# EAGLE board wiseboard8 (EAGLE 8.2.2)
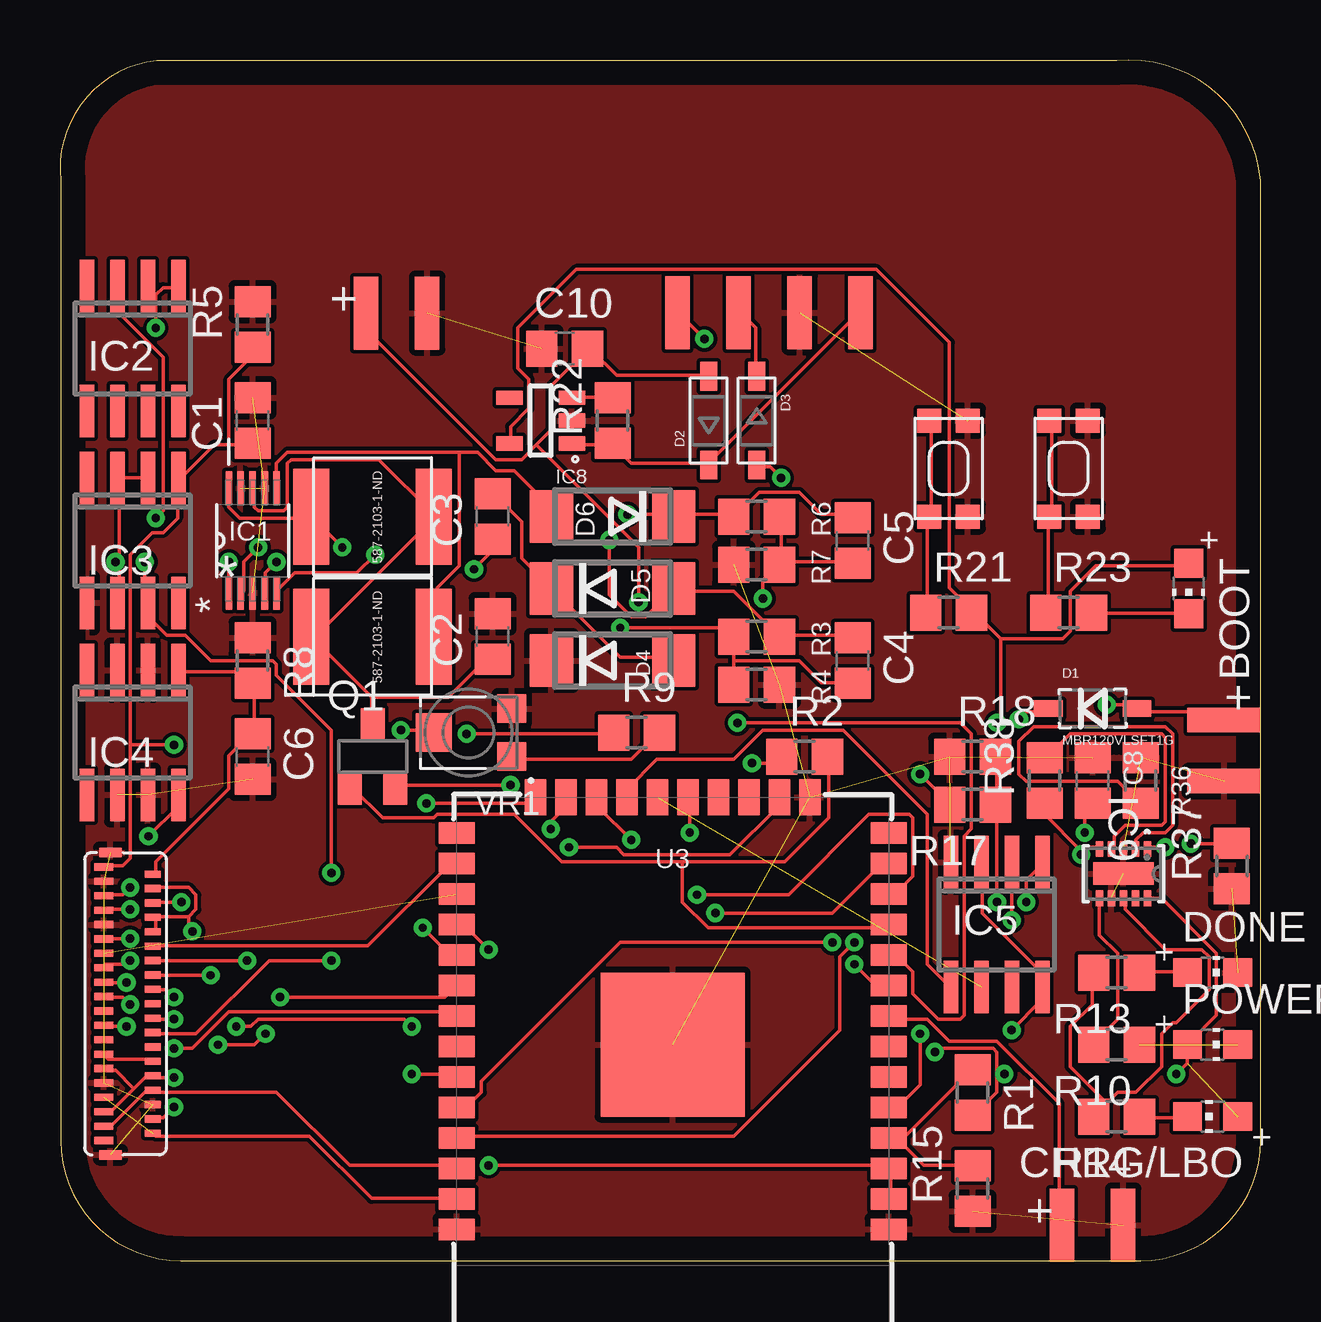
[diagram p0: board, top side]
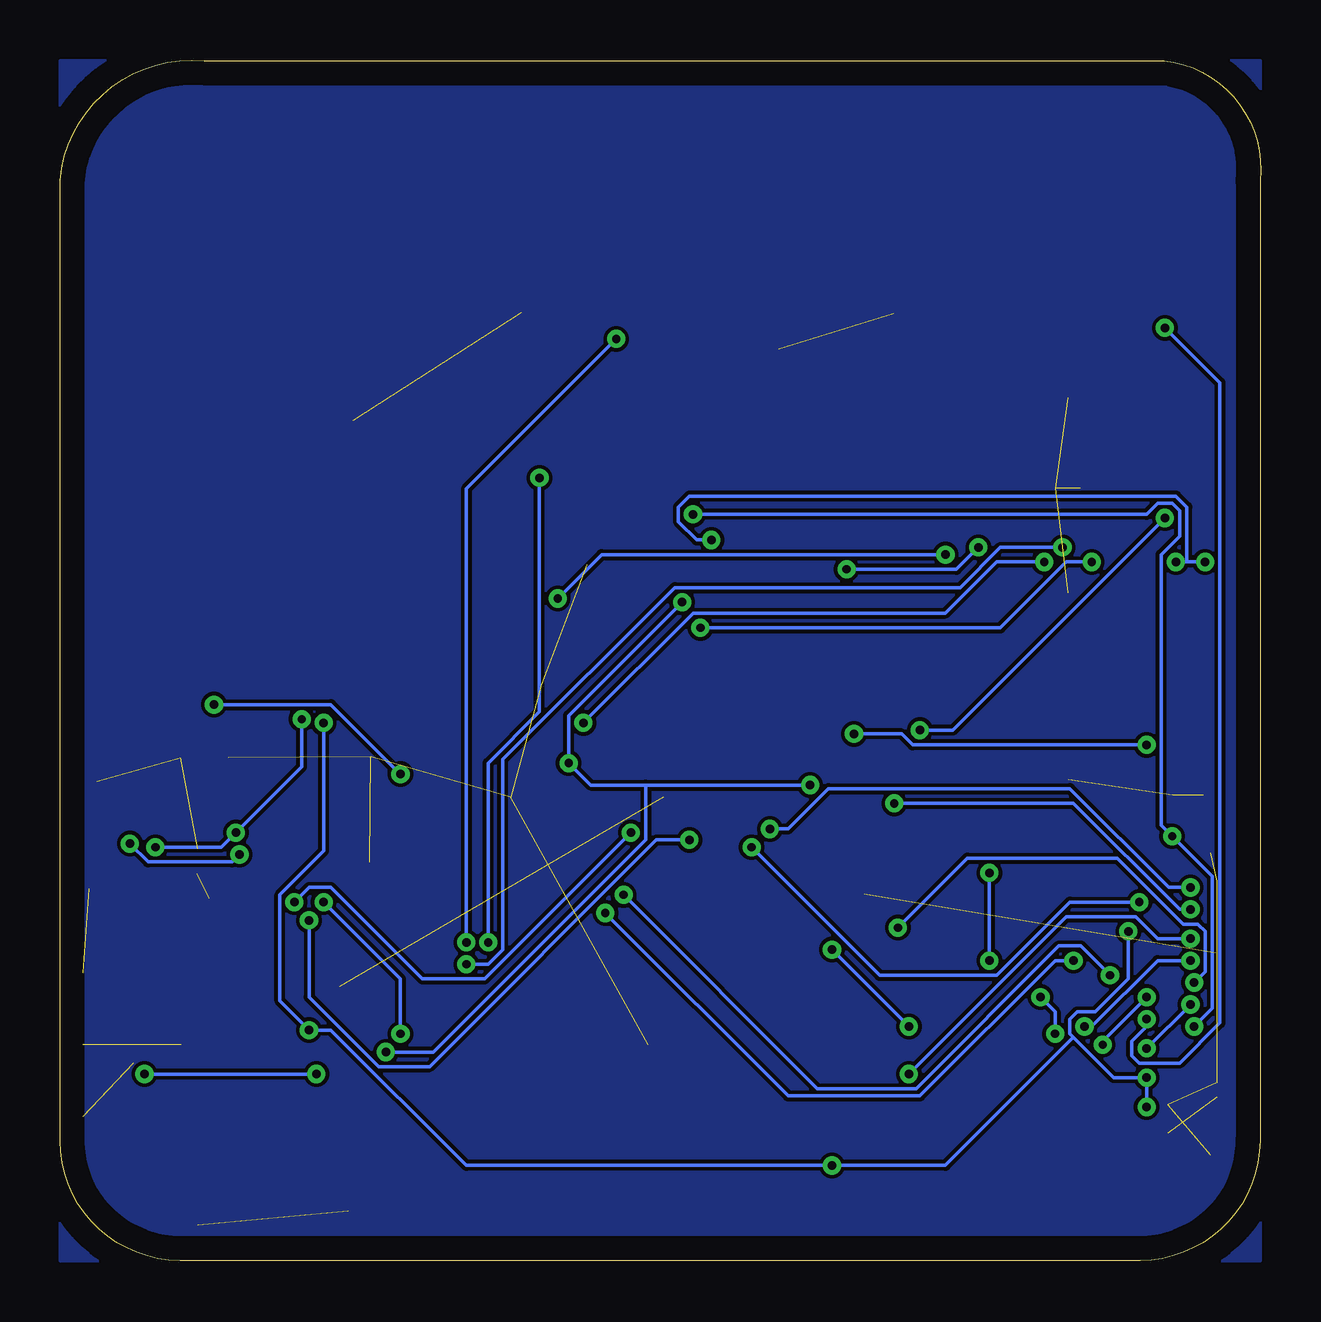
[diagram p1: board, bottom side, seen from below]

Size 50.03 x 50.02 mm. Coordinates in mm from the lower left corner, seen from the top.
Outline: 44.03,50 4.03,50 arc90 0.03,45 0.03,5 arc90 5.03,0 45.03,0 arc90 50.03,5 50.03,45 arc90 44.03,50
Copper layers (1*16): Top 0.035mm / dielectric 1.5mm / Bottom 0.035mm
Design rules "default": minimum track width 6mil, minimum drill 0.35mm, track to track 6mil, track to pad 6mil, pad to pad 6mil, via to via 6mil, smd to smd 6mil, copper to edge 40mil, drill to drill 6mil, minimum pad ring 10mil, minimum via ring 8mil, stop-mask expansion 4mil, vias tented up to drill 0mil, thermal gap 10mil

## Footprints (pad centres in the part's own frame; a part is rotated, then mirrored left to right if it is on the bottom)
587-2103-1-ND = smd 1.5 x 4: P$1 -2.55,0; P$2 2.55,0
CHIP-LED0805 = smd 1.2 x 1.2: A 0,-1.05; C 0,1.05
C0805 = smd 1.3 x 1.5: 1 -0.95,0; 2 0.95,0
SOD-123 = smd 1.2 x 0.7: A 1.85,0; C -1.85,0
DO214AA = smd 1.8 x 2.2: A 2.55,0; C -2.55,0
SOP50P490X110-10N = smd 1.397 x 0.279: 1 -2.184,0.991; 2 -2.184,0.508; 3 -2.184,0; 4 -2.184,-0.508; 5 -2.184,-0.991; 6 2.184,-0.991; 7 2.184,-0.508; 8 2.184,0; 9 2.184,0.508; 10 2.184,0.991
SO08 = smd 0.6 x 2.2: 1 -1.905,-2.6; 2 -0.635,-2.6; 3 0.635,-2.6; 4 1.905,-2.6; 5 1.905,2.6; 6 0.635,2.6; 7 -0.635,2.6; 8 -1.905,2.6
SO8 = smd 0.6 x 2.2: 1 -1.905,-2.6; 2 -0.635,-2.6; 3 0.635,-2.6; 4 1.905,-2.6; 5 1.905,2.6; 6 0.635,2.6; 7 -0.635,2.6; 8 -1.905,2.6
SOT95P280X145-5N = smd 1.1 x 0.6: 1 -1.3,0.95; 2 -1.3,0; 3 -1.3,-0.95; 4 1.3,-0.95; 5 1.3,0.95
DQC10_P84X2P4 = smd 0.66 x 0.305: 1 -1.029,1; 2 -1.029,0.5; 3 -1.029,0; 4 -1.029,-0.5; 5 -1.029,-1; 6 1.029,-1; 7 1.029,-0.5; 8 1.029,0; 9 1.029,0.5; 10 1.029,1 | smd 0.94 x 2.515: 11 0,0
EDGE_CON_2 = smd 1.016 x 3.048: 1 1.27,1.524; 2 -1.27,1.524
EDGE_CON_4 = smd 1.016 x 3.048: 1 2.54,0.254; 2 0,0.254; 3 -5.08,0.254; 4 -2.54,0.254
SOT23 = smd 1 x 1.4: 1 -0.95,-1.306; 2 0.95,-1.306; 3 0,1.306
R0805 = smd 1.3 x 1.5: 1 -0.95,0; 2 0.95,0
KMR2 = smd 1 x 1: 1 2,0.8; 2 2,-0.8; 3 -2,0.8; 4 -2,-0.8
ESP-WROOM-03 = smd 0.9 x 1.5: 1 7.7,9; 2 6.43,9; 3 5.16,9; 4 3.89,9; 5 2.62,9; 6 1.35,9; 7 0.08,9; 8 -1.19,9; 9 -2.46,9; 10 -3.73,9; 11 -5,9; 12 -6.27,9; 13 -7.54,9; 14 -8.81,9; 25 -8.81,-9; 26 -7.54,-9; 27 -6.27,-9; 28 -5,-9; 29 -3.73,-9; 30 -2.46,-9; 31 -1.19,-9; 32 0.08,-9; 33 1.35,-9; 34 2.62,-9; 35 3.89,-9; 36 5.16,-9; 37 6.43,-9; 38 7.7,-9 | smd 1.5 x 0.9: 15 -10.3,5.715; 16 -10.3,4.445; 17 -10.3,3.175; 18 -10.3,1.905; 19 -10.3,0.635; 20 -10.3,-0.635; 21 -10.3,-1.905; 22 -10.3,-3.175; 23 -10.3,-4.445; 24 -10.3,-5.715 | smd 6 x 6: GND 0,0
HFQ339CT-ND = smd 0.4 x 0.95: GND@1 6.6,-0.925; GND@2 -6,-0.925 | smd 0.3 x 0.8: P$1 -5.4,-1.2; P$3 -4.8,-1.2; P$5 -4.2,-1.2; P$7 -3.6,-1.2; P$9 -3,-1.2; P$11 -2.4,-1.2; P$13 -1.8,-1.2; P$15 -1.2,-1.2; P$17 -0.6,-1.2; P$19 0,-1.2; P$21 0.6,-1.2; P$23 1.2,-1.2; P$25 1.8,-1.2; P$27 2.4,-1.2; P$29 3,-1.2; P$31 3.6,-1.2; P$33 4.2,-1.2; P$35 4.8,-1.2; P$37 5.4,-1.2; P$39 6,-1.2 | smd 0.3 x 0.65: P$2 -5.1,0.838; P$4 -4.5,0.838; P$6 -3.9,0.838; P$8 -3.3,0.838; P$10 -2.7,0.838; P$12 -2.1,0.838; P$14 -1.5,0.838; P$16 -0.9,0.838; P$18 -0.3,0.838; P$20 0.3,0.838; P$22 0.9,0.838; P$24 1.5,0.838; P$26 2.1,0.838; P$28 2.7,0.838; P$30 3.3,0.838; P$32 3.9,0.838; P$34 4.5,0.838; P$36 5.1,0.838; P$38 5.7,0.838
TRIM_TC33X-2-103E = smd 1.2 x 1.2: 1 -1.8,1; 3 -1.8,-1 | smd 1.5 x 1.6: 2 1.45,0

## Placement (x,y rotation side)
22  587-2103-1-ND  [587-2103-1-ND]  13.03,31 180 top
BOOT  LED1  [CHIP-LED0805]  47.03,28 180 top
C1  1uF  [C0805]  8.03,35 90 top
C2  1uF  [C0805]  18.03,26 90 top
C3  1uF  [C0805]  18.03,31 90 top
C4  10uF  [C0805]  33.03,25 270 top
C5  10uF  [C0805]  33.03,30 270 top
C6  1uF  [C0805]  8.03,21 270 top
C8  10uF  [C0805]  43.03,20 270 top
C10  10uF  [C0805]  21.03,38 0 top
CHRG/LBO  LED3  [CHIP-LED0805]  48.03,6 90 top
D1  MBR120VLSFT1G  [SOD-123]  43.03,23 0 top
D2  MBR120  [SOD-123]  27.03,35 90 top
D3  1n4148  [SOD-123]  29.03,35 270 top
D4  SS24  [DO214AA]  23.03,25 0 top
D5  SS24  [DO214AA]  23.03,28 0 top
D6  SS24  [DO214AA]  23.03,31 180 top
DONE  LED4  [CHIP-LED0805]  48.03,12 270 top
IC1  LT1945  [SOP50P490X110-10N]  8.03,30 90 top
IC2  LM358  [SO08]  3.03,38 180 top
IC3  L79L15  [SO8]  3.03,30 180 top
IC4  L78L15  [SO8]  3.03,22 180 top
IC5  W25Q  [SO8]  39.03,14 180 top
IC8  IC6  [SOT95P280X145-5N]  20.03,35 180 top
IC9  BQ24210DQCT  [DQC10_P84X2P4]  44.31,16.12 270 top
J1  BAT_CON  [EDGE_CON_2]  14.03,41 180 top
J2  SOL_CON  [EDGE_CON_2]  50.03,21.25 90 top
J3  PROG_HEADER  [EDGE_CON_4]  28.28,39.75 180 top
J4  BUT_CON  [EDGE_CON_2]  43.03,3 180 top
POWERGOOD  LED2  [CHIP-LED0805]  48.03,9 270 top
Q1  IRLM  [SOT23]  13.03,21 0 top
R1  10K  [R0805]  38.03,7 270 top
R2  10k  [R0805]  31.03,21 0 top
R3  470k  [R0805]  29.03,26 0 top
R4  39k  [R0805]  29.03,24 180 top
R5  39k  [R0805]  8.03,39 90 top
R6  560k  [R0805]  29.03,31 180 top
R7  39k  [R0805]  29.03,29 0 top
R8  39k  [R0805]  8.03,25 270 top
R9  200k  [R0805]  24.03,22 0 top
R10  1K  [R0805]  44.03,9 180 top
R13  1K  [R0805]  44.03,12 180 top
R14  1K  [R0805]  44.03,6 180 top
R15  10K  [R0805]  38.03,3 90 top
R17  10K  [R0805]  38.03,19 180 top
R18  10K  [R0805]  38.03,21 0 top
R21  10K  [R0805]  37.03,27 0 top
R22  10K  [R0805]  23.03,35 90 top
R23  1K  [R0805]  42.03,27 0 top
R36  790  [R0805]  45.03,20 270 top
R37  10k  [R0805]  48.83,16.44 90 top
R38  7.6k  [R0805]  41.03,20 90 top
SW1  SPST_TACT-KMR2  [KMR2]  42.03,33 270 top
SW2  SPST_TACT-KMR2  [KMR2]  37.03,33 270 top
U3  ESP-WROOM-03  [ESP-WROOM-03]  25.53,9 270 top
U$4  FH26W-39S  [HFQ339CT-ND]  3.03,11 270 top
U$5  587-2103-1-ND  [587-2103-1-ND]  13.03,26 180 top
VR1  TC33X-104ECT-ND  [TRIM_TC33X-2-103E]  17.03,22 180 top

## Library data of the parts
22 D4-D6 IC3-IC5 IC8 J1-J4 U$4 U$5 = WISE
BOOT CHRG/LBO D2 D3 DONE POWERGOOD SW1 SW2 = adafruit
C1-C6 C8 C10 R1-R10 R13-R15 R17 R18 R21-R23 R36-R38 = resistor
D1 = microbuilder
IC1 = LTC_By_element14_Batch_1; MPN: LT1945EMS#PBF; OC_FARNELL: 1273495; OC_NEWARK: 57M7266; PACKAGE: MSOP-10; SUPPLIER: Linear Technology
IC2 = linear
IC9 = WISE; MANUFACTURER_PART_NUMBER: BQ24210DQCT; VENDOR: Vendor
Q1 = IRLML6402; AVAILABILITY: Unavailable; DESCRIPTION: MOSFETs, Semiconductors and Actives, mosfet, Transistors, Discretes (diodes, transistors, thyristors ...); MF: International Rectifier; MP: IRLML6402; PACKAGE: SOT-23-3 International Rectifier; PRICE: None
U3 = esp32
VR1 = WISE; AVAILABILITY: Good; DESCRIPTION: Res%20Trimmer%2010K%20Ohm%2025%25%200.1W%281/10W%29%201%28Elec%29/1%28Mech%29Turn%20%283%20X%203.8mm%29%20Foot%20Print%20SMD%20Embossed%20T/R; MF: Bourns; MP: TC33X-2-103E; PACKAGE: None; PRICE: 0.16 USD

## Nets
+3V3: BOOT.A IC5.3 IC5.8 IC8.5 R21.2 U3.2 U3.3 U$4.P$4 U$4.P$8 U$4.P$10 U$4.P$29 U$4.P$30 U$4.P$35 U$4.P$36
+15V: C6.1 IC4.1 R8.2 U$4.P$2
+22V: C5.1 D6.C IC4.8 R6.2 U$4.P$23
-15V: C1.1 IC3.1 R5.1 R9.1 U$4.P$1
-20V: C4.1 D5.A IC3.2 IC3.3 IC3.6 IC3.7 R3.2 U$4.P$24
BAT_SENS: R1.1 R15.2 U3.4
BUT_CON: J4.1 U3.8
CKV: U3.37 U$4.P$33 U$4.P$38
CL: U3.23 U$4.P$5
CLK: IC5.6 U3.20
D0: U3.26 U$4.P$12
D1: U3.27 U$4.P$13
D2: U3.13 U$4.P$14
D3: U3.28 U$4.P$15
D4: U3.12 U$4.P$16
D5: U3.29 U$4.P$17
D6: U3.30 U$4.P$18
D7: U3.31 U$4.P$19
ESP_DI: IC5.2 U3.22
ESP_DO: IC5.5 U3.21
FB2: C5.2 IC1.5 R6.1 R7.2
GMODE: U$4.P$27 U$4.P$28
GND: C1.2 C2.2 C6.2 C8.1 C10.1 D4.C DONE.C IC1.3 IC1.7 IC1.9 IC3.5 IC4.2 IC4.3 IC4.6 IC4.7 IC5.4 IC8.2 IC9.3 IC9.7 IC9.11 J1.2 J2.2 J3.4 J4.2 R4.1 R5.2 R7.1 R8.1 R15.1 R18.1 R36.1 R37.1 SW1.1 SW1.3 SW2.1 SW2.3 U3.1 U3.15 U3.38 U3.GND U$4.GND@1 U$4.GND@2 U$4.P$3 U$4.P$9 U$4.P$31 U$4.P$34 VR1.3
GPIO0: R23.1 SW1.2 SW1.4
IC5: IC5.1 U3.19
LE: U3.16 U$4.P$6
N$1: IC2.3 VR1.2
N$2: 22.P$2 C3.1 IC1.10
N$3: C8.2 D1.C IC9.1
N$4: 22.P$1 C2.1 IC1.8 Q1.3 U$5.P$2
N$5: D6.A IC1.6 U$5.P$1
N$6: C3.2 D4.A D5.C
N$7: U3.25
N$8: R9.2 VR1.1
N$9: IC9.6 R10.2
N$10: CHRG/LBO.C R14.1
N$11: POWERGOOD.C R10.1
N$14: DONE.A R13.1
N$15: IC9.8 R13.2 R14.2
N$17: IC9.2 R36.2
N$22: BOOT.C R23.2
N$23: IC8.3 R22.2
N$28: IC9.5 R37.2 R38.1
N$30: IC9.4 R38.2
N$37: U3.14
N$48: U3.6
N$49: U3.7
NEGEN: IC1.2 U3.9
NFB1: C4.2 IC1.1 R3.1 R4.2
OE: U3.24 U$4.P$7
PANEL: D1.A J2.1 R17.2
PANEL_SENS: R17.1 R18.2 U3.5
POSEN: IC1.4 U3.10
RESET: R21.1 SW2.2 SW2.4
RXD: D3.A U3.34
RXD_5V: D3.C J3.2
SPH: U3.33 U$4.P$11
SPV: U3.36 U$4.P$32 U$4.P$37
SUP_CTRL: Q1.1 R2.2 U3.11
TXD: J3.1 U3.35
V+: IC2.8
V-: IC2.4
VBAT: C10.2 CHRG/LBO.A D2.A IC9.10 J1.1 POWERGOOD.A Q1.2 R1.2 R2.1
VCC: D2.C IC8.1 J3.3 R22.1
VCOMMON: IC2.1 IC2.2 U$4.P$22

## Tracks (layer width: path | path; a pad name or v marks a point on that pad's centre or on a via)
+3V3  (via drill 0.35)
  Top 0.152: IC8.5 18.77,34.14 18.77,34.75 19.53,35.51 19.53,36.73 19.08,37.19 19.08,38.86 21.51,41.3 34.01,41.3 37.06,38.25 37.06,28.04 37.97,27.13 R21.2 38.13,26.98 39.19,25.91 | 39.19,25.91 41.78,25.91 42.09,26.21 42.09,27.89 43.16,28.96 46.97,28.96 BOOT.A | IC5.3 38.43,16.46 38.43,14.48 40.87,12.04 40.87,11.43 IC5.8 40.87,11.28 40.87,10.82 v39.65,9.6 | U3.2 34.62,2.59 34.62,3.81 U3.3 34.47,3.96 v17.86,3.96 | U$4.P$10 3.99,13.72 3.99,14.17 U$4.P$8 3.99,14.33 5.36,14.33 | 5.36,14.33 5.67,14.63 5.67,15.24 5.36,15.54 3.99,15.54 U$4.P$4 | v4.75,6.4 4.29,5.94 3.99,5.94 U$4.P$36 | v4.75,7.62 3.99,7.62 U$4.P$30 3.84,7.62 3.53,7.62 3.07,7.16 | 3.07,7.16 2.16,6.25 1.86,6.25 U$4.P$35 | 3.07,7.16 2.31,7.92 1.86,7.92 U$4.P$29 | 5.36,14.33 5.36,13.87 v5.51,13.72 | 39.19,25.91 39.19,22.55 v39.04,22.4
  Bottom 0.152: v4.75,6.4 v4.75,7.62 6.12,7.62 7.8,9.3 | v5.51,13.72 5.51,11.73 6.88,10.36 7.65,10.36 7.95,10.06 7.95,9.45 7.8,9.3 | 7.8,9.3 13.13,3.96 v17.86,3.96 33.1,3.96 38.74,9.6 v39.65,9.6 40.87,10.82 40.87,15.24 39.04,17.07 v39.04,22.4
+15V
  Top 0.152: U$4.P$2 3.99,16.15 3.99,16.61 7.04,19.66 7.04,21.03 7.95,21.95 C6.1 8.1,22.1 8.1,23.93 R8.2 7.95,24.08 7.49,24.54 5.06,24.54 IC4.1
+22V  (via drill 0.35)
  Top 0.152: C5.1 32.94,31.09 31.73,31.09 30.81,32 29.13,32 28.22,31.09 R6.2 28.07,31.09 25.63,31.09 D6.C 25.48,31.09 v23.65,31.09 | v2.77,9.75 1.86,9.75 U$4.P$23 | v3.68,17.68 4.9,18.9 4.9,19.36 IC4.8
  Bottom 0.152: v2.77,9.75 2.01,10.52 2.01,16 v3.68,17.68 4.14,18.14 4.14,29.41 3.38,30.18 3.38,31.24 3.68,31.55 4.29,31.55 4.75,31.09 v23.65,31.09
-15V  (via drill 0.35)
  Top 0.152: 2.92,21.49 2.92,29.41 3.84,30.33 4.29,30.33 4.9,30.94 4.9,32.46 IC3.1 5.06,32.61 6.43,33.98 7.04,33.98 | 2.92,21.49 2.92,16.76 2.62,16.46 1.86,16.46 U$4.P$1 | v16.94,21.95 23.04,21.95 R9.1 | 2.92,21.49 v4.75,21.49 | 7.04,33.98 7.95,33.98 C1.1 | 7.04,33.98 7.04,36.73 7.95,37.64 7.95,37.95 R5.1
  Bottom 0.152: v16.94,21.95 14.96,21.95 14.5,21.49 v4.75,21.49
-20V  (via drill 0.35)
  Top 0.152: C4.1 32.94,26.06 30.05,26.06 R3.2 29.9,26.06 28.07,27.89 25.63,27.89 D5.A 25.48,27.89 24.41,26.82 23.8,26.82 22.89,27.74 v22.89,30.02 | 2.46,29.11 2.46,32.46 IC3.3 2.46,32.61 3.53,32.61 IC3.2 | 2.46,29.11 2.46,27.43 IC3.6 | v11.3,12.5 8.71,12.5 5.67,9.45 3.99,9.45 U$4.P$24 | v11.3,16.15 11.3,22.1 9.02,24.38 9.02,24.84 8.87,24.99 6.27,24.99 5.21,26.06 4.45,26.06 3.68,26.82 3.68,27.28 IC3.7 3.53,27.43 v3.53,29.11 | v2.31,29.11 2.46,29.11
  Bottom 0.152: v11.3,16.15 v11.3,12.5 | v3.53,29.11 3.07,29.11 | 3.07,29.11 v2.31,29.11 | v22.89,30.02 23.5,30.02 24.26,30.79 24.26,31.39 23.8,31.85 3.53,31.85 3.07,31.39 3.07,29.11
BAT_SENS
  Top 0.152: 34.93,5.03 35.99,3.96 37.97,3.96 R15.2 | 34.93,5.03 34.62,5.03 U3.4 34.93,5.03 | 34.93,5.03 35.08,5.03 37.97,7.92 R1.1
BUT_CON
  Top 0.152: U3.8 34.62,10.06 36.15,10.06 37.06,9.14 39.04,9.14 41.63,6.55 41.63,1.52 J4.1
CKV  (1 unrouted)
  Top 0.152: U$4.P$38 3.99,5.18 10.39,5.18 12.98,2.59 16.49,2.59 U3.37
CL  (via drill 0.35)
  Top 0.152: v2.92,15.54 2.62,15.24 1.86,15.24 U$4.P$5 | v20.45,17.98 20.45,18.29 21.06,18.9 21.06,19.2 U3.23
  Bottom 0.152: v2.92,15.54 3.84,15.54 7.95,19.66 18.01,19.66 19.69,17.98 v20.45,17.98
CLK  (1 unrouted)
D0
  Top 0.152: U$4.P$12 3.99,13.11 12.83,13.11 16.18,16.46 16.49,16.46 U3.26
D1  (1 unrouted)
D2  (via drill 0.35)
  Top 0.152: v7.8,12.5 3.99,12.5 U$4.P$14 | v27.31,14.48 32.18,14.48 34.16,16.46 34.47,16.46 U3.13
  Bottom 0.152: v7.8,12.5 8.56,12.5 14.2,6.86 19.69,6.86 v27.31,14.48
D3  (via drill 0.35)
  Top 0.152: v2.92,12.5 2.77,12.34 1.86,12.34 U$4.P$15 | v7.34,9.75 7.95,9.75 8.26,10.06 14.35,10.06 v14.66,9.75 | v17.86,12.95 16.94,13.87 16.64,13.87 U3.28
  Bottom 0.152: v2.92,12.5 4.29,12.5 7.04,9.75 v7.34,9.75 | v17.86,12.95 v14.66,9.75
D4  (via drill 0.35)
  Top 0.152: v6.27,11.89 3.99,11.89 U$4.P$16 | v26.54,15.24 30.35,15.24 33.71,18.59 35.38,18.59 35.54,18.44 35.54,16 34.93,15.39 34.62,15.39 U3.12
  Bottom 0.152: v6.27,11.89 7.49,13.11 8.41,13.11 14.35,7.16 18.47,7.16 v26.54,15.24
D5  (via drill 0.35)
  Top 0.152: v2.77,11.58 1.86,11.58 U$4.P$17 | v15.11,13.87 16.18,12.8 16.49,12.8 U3.29
  Bottom 0.152: v2.77,11.58 2.31,12.04 2.31,13.72 2.62,14.02 3.23,14.02 5.97,16.76 12.22,16.76 v15.11,13.87
D6  (via drill 0.35)
  Top 0.152: v4.75,10.97 4.45,11.28 3.99,11.28 U$4.P$18 | v6.58,8.99 8.1,8.99 v8.56,9.45 | v9.17,10.97 16.03,10.97 16.49,11.43 U3.30
  Bottom 0.152: v4.75,10.97 6.58,9.14 v6.58,8.99 | v8.56,9.45 8.56,10.36 v9.17,10.97
D7  (via drill 0.35)
  Top 0.152: v2.92,10.67 2.62,10.97 1.86,10.97 U$4.P$19 | v4.75,8.84 5.51,8.84 7.04,10.36 16.33,10.36 16.49,10.21 U3.31
  Bottom 0.152: v4.75,8.84 v2.92,10.67
ESP_DI  (via drill 0.35)
  Top 0.152: v23.8,17.53 22.43,18.9 22.43,19.2 U3.22 | v39.65,14.17 39.65,16.46 IC5.2
  Bottom 0.152: v23.8,17.53 25.17,17.53 34.62,8.08 36.75,8.08 39.65,10.97 v39.65,14.17
ESP_DO
  Top 0.152: U3.21 23.65,19.36 23.65,19.66 24.87,20.88 28.07,20.88 29.29,22.1 32.64,22.1 36.15,18.59 36.15,12.34 37.06,11.43 IC5.5
FB2  (via drill 0.35)
  Top 0.152: v13.13,29.41 12.37,28.65 9.78,28.65 9.02,27.89 IC1.5 | v29.29,27.58 29.29,28.35 29.9,28.96 R7.2 30.05,29.11 | 30.05,29.11 30.05,30.94 R6.1 | 30.05,29.11 32.94,29.11 C5.2
  Bottom 0.152: v13.13,29.41 27.46,29.41 v29.29,27.58
GMODE
  Top 0.152: U$4.P$28 3.84,8.38 2.01,8.38 1.86,8.53 U$4.P$27
GND  (23 unrouted)
  pour Bottom: 0.03,50 0.03,0 50.03,0 50.03,50
  pour Top: 0.03,50 0.03,0 50.03,0 50.03,50
GPIO0
  Top 0.152: SW1.4 41.33,34.9 41.33,31.09 SW1.2 41.17,30.94 41.17,27.13 R23.1
IC5  (via drill 0.35)
  Top 0.152: v26.24,17.83 26.24,19.2 U3.19 | v40.26,14.94 40.26,15.85 40.87,16.46 IC5.1
  Bottom 0.152: v26.24,17.83 32.34,11.73 34.93,11.73 38.74,15.54 39.65,15.54 v40.26,14.94
LE  (via drill 0.35)
  Top 0.152: v5.06,14.94 3.99,14.94 U$4.P$6 | v21.21,17.22 23.19,17.22 23.5,16.92 27.92,16.92 29.9,18.9 29.9,19.2 U3.16
  Bottom 0.152: v5.06,14.94 7.95,14.94 11,11.89 15.88,11.89 v21.21,17.22
N$1  (via drill 0.35)
  Top 0.152: v14.2,22.1 15.57,22.1 VR1.2 | v3.99,30.94 4.29,31.24 4.29,37.64 2.46,39.47 2.46,40.54 IC2.3
  Bottom 0.152: v14.2,22.1 12.83,22.1 v3.99,30.94
N$2  (via drill 0.35)
  Top 0.152: IC1.10 7.04,32.16 7.04,31.39 7.49,30.94 10.39,30.94 22.P$2 10.54,30.94 v11.76,29.72 | v17.25,28.8 18.01,29.57 18.01,30.02 C3.1
  Bottom 0.152: v17.25,28.8 12.68,28.8 v11.76,29.72
N$3  (via drill 0.35)
  Top 0.152: v46.05,17.22 45.44,17.22 IC9.1 | v42.7,17.83 42.7,18.75 43,19.05 C8.2 | v39.96,22.55 40.26,22.86 41.17,22.86 D1.C
  Bottom 0.152: v46.05,17.22 43.31,17.22 v42.7,17.83 39.96,20.57 v39.96,22.55
N$4
  Top 0.152: IC1.8 8.1,32.16 8.1,31.39 8.26,31.24 9.32,31.24 9.48,31.39 9.48,33.22 9.63,33.38 13.29,33.38 15.57,31.09 22.P$1 15.57,30.94 10.54,25.91 | 12.98,23.47 12.98,22.4 Q1.3 | 10.54,25.91 12.98,23.47 | 12.98,23.47 16.18,23.47 17.7,24.99 18.01,24.99 C2.1 | 10.54,25.91 U$5.P$2
N$5
  Top 0.152: 16.64,33.68 17.4,33.68 18.16,32.92 18.92,32.92 20.45,31.39 20.45,31.09 D6.A | 16.64,33.68 9.48,33.68 9.02,33.22 9.02,32.31 IC1.6 | 16.64,33.68 16.64,28.96 15.72,28.04 15.72,26.06 U$5.P$1
N$6
  Top 0.152: C3.2 18.16,31.85 19.23,30.79 19.23,29.26 20.45,28.04 D5.C 20.6,27.89 23.34,25.15 25.48,25.15 D4.A
N$8
  Top 0.152: VR1.1 18.92,20.88 23.8,20.88 24.87,21.95 R9.2
N$9
  Top 0.152: IC9.6 43.31,13.56 44.07,12.8 44.07,10.06 43.16,9.14 R10.2
N$10
  Top 0.152: CHRG/LBO.C 46.97,5.94 44.98,5.94 R14.1
N$11  (1 unrouted)
N$14
  Top 0.152: DONE.A 46.97,12.04 44.98,12.04 R13.1
N$15
  Top 0.152: 43.61,6.55 43.16,6.1 R14.2 43.61,6.55 | 43.61,6.55 44.07,7.01 44.83,7.01 45.9,8.08 45.9,9.45 46.36,9.91 46.51,9.91 47.88,11.28 47.88,12.65 47.58,12.95 46.05,12.95 44.37,14.63 44.37,15.09 IC9.8 | 43.61,6.55 42.09,8.08 42.09,9.75 43,10.67 43,11.89 R13.2
N$17
  Top 0.152: IC9.2 44.83,17.22 44.83,17.53 45.14,17.83 46.05,17.83 46.36,18.14 46.36,21.95 46.05,22.25 40.56,22.25 39.96,21.64 39.96,20.27 40.26,19.96 44.07,19.96 44.98,19.05 R36.2
N$22
  Top 0.152: BOOT.C 46.97,26.98 43,26.98 R23.2
N$23
  Top 0.152: IC8.3 21.36,35.97 22.89,35.97 R22.2
N$28  (via drill 0.35)
  Top 0.152: 42.55,17.22 42.39,17.22 41.17,18.44 41.17,19.05 R38.1 | 42.55,17.22 43.16,17.22 IC9.5 | v47.12,17.37 48.79,17.37 R37.2 | 42.55,17.22 v42.55,16.92
  Bottom 0.152: v47.12,17.37 46.36,16.61 42.85,16.61 v42.55,16.92
N$30
  Top 0.152: IC9.4 43.92,17.22 43.92,17.68 44.37,18.14 45.9,18.14 46.05,18.29 46.05,21.79 45.9,21.95 42.09,21.95 41.17,21.03 R38.2
NEGEN  (via drill 0.35)
  Top 0.152: v8.26,29.72 7.65,29.11 7.65,27.89 IC1.2 | v33.1,12.34 33.86,11.58 34.47,11.58 U3.9
  Bottom 0.152: v8.26,29.72 10.85,29.72 12.52,28.04 24.41,28.04 31.57,20.88 31.57,12.95 32.18,12.34 v33.1,12.34
NFB1  (via drill 0.35)
  Top 0.152: v7.04,29.11 7.04,27.89 IC1.1 | v23.34,26.36 27.76,26.36 28.07,26.06 R3.1 28.07,25.91 28.07,24.99 | 28.07,24.99 28.07,24.08 R4.2 | 28.07,24.99 30.81,24.99 31.73,24.08 32.94,24.08 C4.2
  Bottom 0.152: v7.04,29.11 8.1,29.11 10.85,26.36 v23.34,26.36
OE  (via drill 0.35)
  Top 0.152: v2.92,14.63 1.86,14.63 U$4.P$7 | v15.27,19.05 19.53,19.05 19.69,19.2 U3.24
  Bottom 0.152: v2.92,14.63 3.38,14.63 7.8,19.05 v15.27,19.05
PANEL  (via drill 0.35)
  Top 0.152: J2.1 48.49,22.55 48.18,22.86 44.98,22.86 D1.A 44.83,23.01 44.68,23.16 v43.61,23.16 | v35.84,20.27 37.06,19.05 R17.2
  Bottom 0.152: v35.84,20.27 38.74,23.16 v43.61,23.16
PANEL_SENS  (via drill 0.35)
  Top 0.152: v35.84,9.45 35.84,7.32 34.93,6.4 34.62,6.4 U3.5 | v39.04,14.94 39.04,18.9 R17.1 39.04,19.05 39.04,20.88 R18.2
  Bottom 0.152: v35.84,9.45 35.84,11.73 v39.04,14.94
POSEN  (via drill 0.35)
  Top 0.152: v9.02,29.11 8.56,28.65 8.56,27.89 IC1.4 | v28.22,22.4 37.52,22.4 37.97,21.95 37.97,17.98 37.67,17.68 37.67,10.21 37.52,10.06 36.6,10.06 35.54,11.12 35.54,12.04 34.93,12.65 34.62,12.65 U3.10
  Bottom 0.152: v9.02,29.11 11,29.11 13.13,26.98 23.65,26.98 v28.22,22.4
RESET
  Top 0.152: SW2.4 36.3,34.9 36.3,31.09 SW2.2 36.15,30.94 36.15,27.13 R21.1
RXD  (via drill 0.35)
  Top 0.152: v30.05,32.61 29.59,33.07 29.13,33.07 D3.A | v32.18,13.26 23.34,13.26 17.55,7.47 17.55,7.01 16.94,6.4 16.64,6.4 U3.34
  Bottom 0.152: v30.05,32.61 30.05,22.86 32.18,20.73 v32.18,13.26
RXD_5V
  Top 0.152: D3.C 28.98,36.88 28.98,38.86 28.37,39.47 J3.2
SPH  (via drill 0.35)
  Top 0.152: v2.92,13.41 1.86,13.41 U$4.P$11 | v14.66,7.77 16.49,7.77 U3.33
  Bottom 0.152: v2.92,13.41 4.29,13.41 5.21,14.33 8.1,14.33 v14.66,7.77
SPV
  Top 0.152: U$4.P$37 1.86,5.64 2.16,5.64 3.53,7.01 3.84,7.01 U$4.P$32 3.99,7.01 9.02,7.01 12.07,3.96 16.49,3.96 U3.36
SUP_CTRL
  Top 0.152: 25.93,16.61 30.2,16.61 32.03,18.44 32.03,20.88 R2.2 | 25.93,16.61 20.91,16.61 18.92,18.59 15.72,18.59 15.57,18.44 13.44,18.44 12.22,19.66 Q1.1 | 25.93,16.61 25.93,14.94 27,13.87 34.47,13.87 U3.11
TXD  (via drill 0.35)
  Top 0.152: v33.1,13.26 32.49,12.65 32.49,9.6 28.07,5.18 16.64,5.18 U3.35 | v26.85,38.41 25.78,39.47 J3.1
  Bottom 0.152: v33.1,13.26 33.1,32.16 v26.85,38.41
VBAT  (via drill 0.35)  (1 unrouted)
  Top 0.152: D2.A 27,36.88 23.19,36.88 22.12,37.95 C10.2 21.97,37.95 20.45,36.42 20.45,34.59 19.84,33.98 | 19.84,33.98 19.23,33.38 18.16,33.38 12.83,38.71 12.83,39.47 J1.1 | IC9.10 45.44,15.09 45.9,15.09 48.18,12.8 48.18,10.21 47.12,9.14 POWERGOOD.A 46.97,8.23 v46.51,7.77 | v18.77,19.81 14.05,19.81 Q1.2 | v28.83,20.73 29.9,20.73 30.05,20.88 R2.1 | 39.04,7.77 39.04,8.69 38.89,8.84 36.6,8.84 v36.45,8.69 | 39.04,7.77 39.04,7.01 38.13,6.1 R1.2 | 39.04,7.77 v39.35,7.77 | 19.84,33.98 24.11,29.72 v24.11,27.43
  Bottom 0.152: 25.63,19.81 27.92,19.81 v28.83,20.73 28.83,22.71 v24.11,27.43 | 25.63,19.81 v18.77,19.81 | v36.45,8.69 34.47,8.69 25.63,17.53 25.63,19.81 | v39.35,7.77 v46.51,7.77
VCC
  Top 0.152: IC8.1 21.36,33.98 22.89,33.98 R22.1 23.04,33.98 23.8,33.22 27,33.22 | 27,33.22 33.25,39.47 J3.3 | 27,33.22 D2.C
VCOMMON  (via drill 0.35)
  Top 0.152: v4.75,10.06 3.99,10.06 U$4.P$22 | 3.99,40.23 v3.99,38.86 | 3.99,40.23 3.68,40.54 IC2.2 | 3.99,40.23 4.29,40.54 4.9,40.54 IC2.1
  Bottom 0.152: v4.75,10.06 4.75,9.75 5.36,9.14 5.36,8.53 5.06,8.23 3.38,8.23 1.7,9.91 1.7,36.58 v3.99,38.86

## Text on the board
tPlace: *